# Altium PCB PCB-SHORT.PcbDoc
Units mm, origin at the board's own origin, x right, y up, seen from the top; angles counter-clockwise.
Board outline 22.9 x 21.8 mm, 2 copper layers (Top Layer, Bottom Layer), stack 1.57 mm thick; 29 components, 12 nets, 79 pads, 43 vias.
Unrouted connection lines stored in the file: 11.
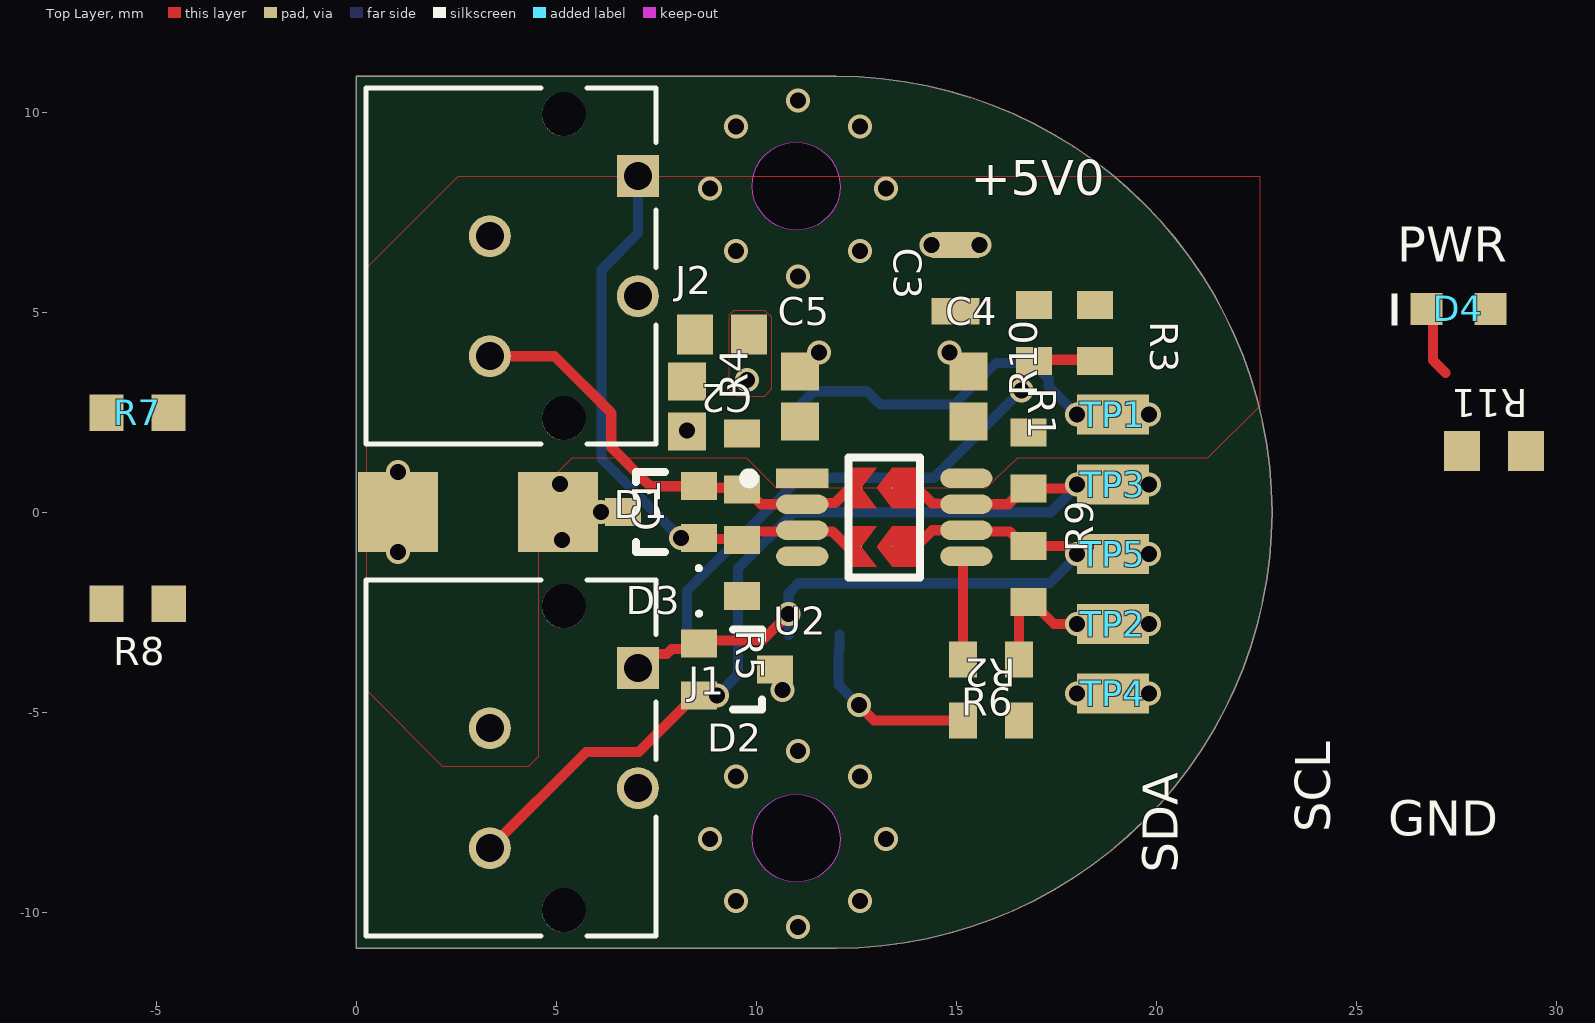
[diagram p0: Top Layer view]
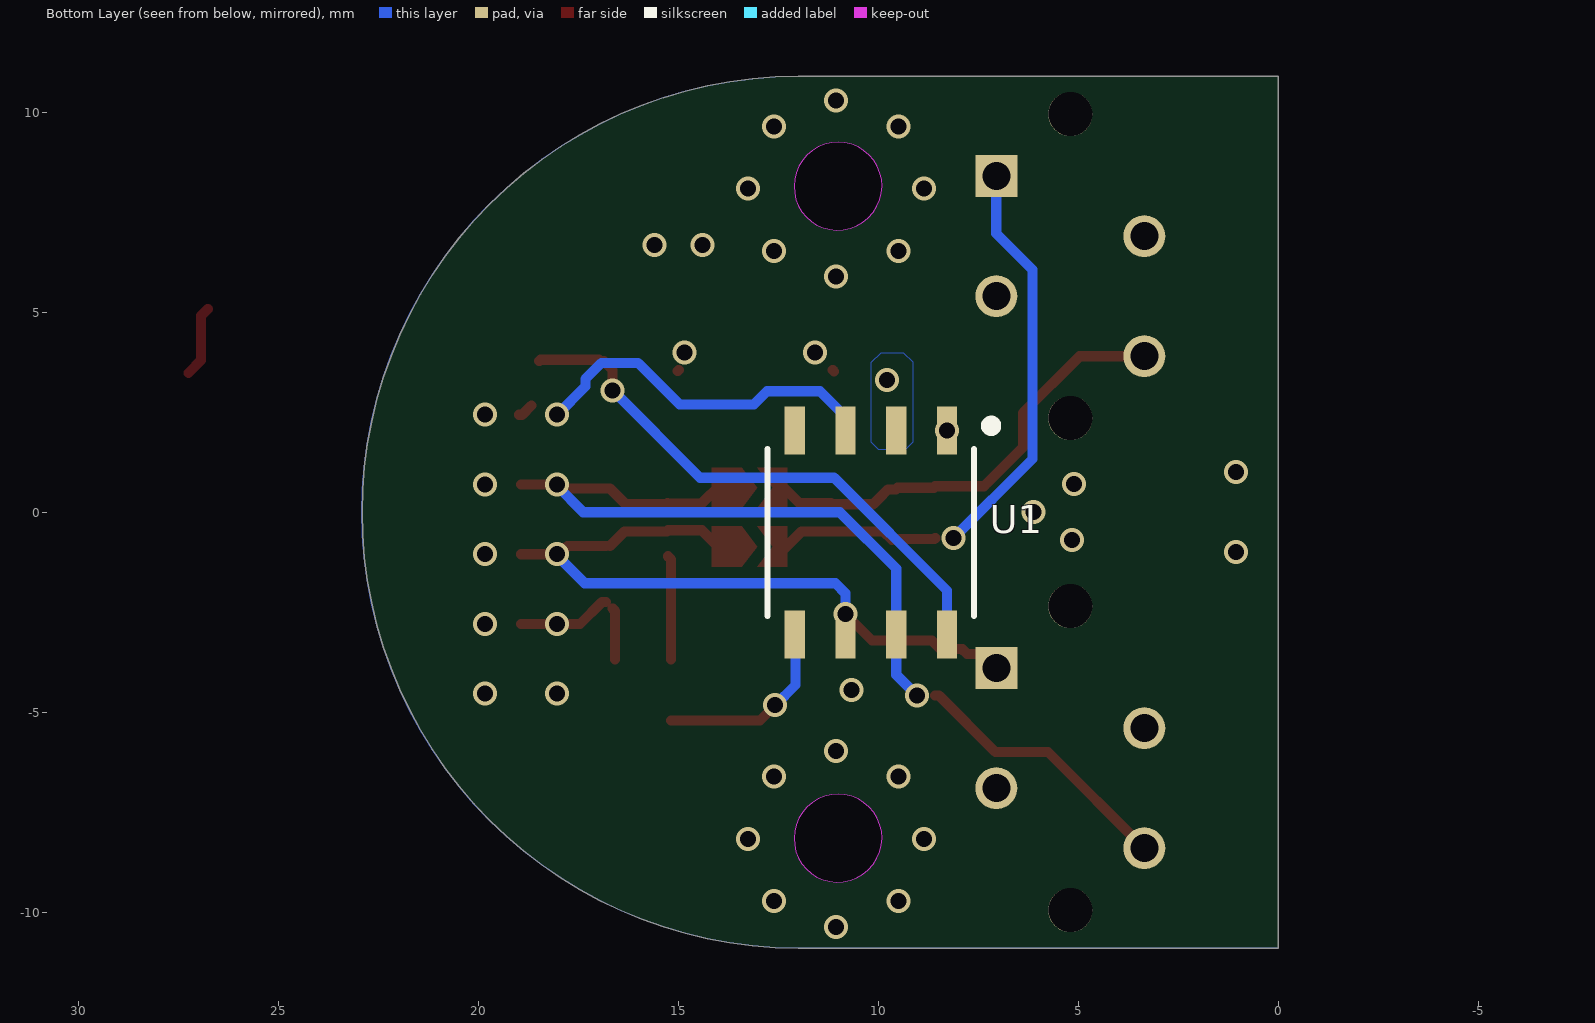
[diagram p1: Bottom Layer view, seen from below]

## Layer stack, top to bottom
Top Solder: solder mask 0.01, Solder Resist, Dk 3.5
Top Layer: signal copper 0.035
Dielectric 1: dielectric 1.5, FR-4, Dk 4.8
Bottom Layer: signal copper 0.035
Bottom Solder: solder mask 0.01, Solder Resist, Dk 3.5

## Board outline
0,-10.9 0,10.9 12,10.9 cw(c12,0) 12,-10.9
cut-out: 11.041,-9.249 cw(c11.02,-8.129) 9.9,-8.15 cw(c11,-8.15) 11,-7.05 cw(c11,-8.15) 12.1,-8.15 cw(c11.021,-8.17)
cut-out: 11.041,7.051 cw(c11.02,8.171) 9.9,8.15 cw(c11,8.15) 11,9.25 cw(c11,8.15) 12.1,8.15 cw(c11.021,8.13)

## Design rules (kind name [scope] priority, off if disabled: settings)
AssemblyTestPointUsage [All] p1: valid=2
Clearance [All] p1: gap=0.254 ignorepadtopadclearanceinfootprint=TRUE except(0: Arc-Hole Track-Hole SMDPad-Hole THPad-Hole Via-Hole Fill-Hole Poly-Hole Region-Hole Text-Hole)
FabricationTestPointUsage [All] p1: valid=2 allowmultiple=FALSE
HoleSize [All] p1: absolutevalues=TRUE maxlimit=6.3 minlimit=0.025 maxpercent=80.000 minpercent=20.000
MinimumSolderMaskSliver [All] p1: minsoldermaskwidth=0.1
NetAntennae [All] p1 off: netantennaetolerance=1
PolygonConnect Vias [IsVia] p1: connectstyle=Direct reliefconductorwidth=0.254 reliefentries=4 polygonreliefangle="90 Angle" airgapwidth=0.254
PolygonConnect DirectClass [InPadClass('Direct')] p2: connectstyle=Direct reliefconductorwidth=0.254 reliefentries=4 polygonreliefangle="90 Angle" airgapwidth=0.254
PolygonConnect [All] p3: connectstyle=Relief reliefconductorwidth=0.254 reliefentries=4 polygonreliefangle="90 Angle" airgapwidth=0.254
RoutingVias [All] p1: holewidth=0.4 width=0.6 viastyle="Through Hole" minholewidth=0.3 minwidth=0.5 maxholewidth=1 maxwidth=2
SolderMaskExpansion [All] p1: expansion=0.102 istentingtop=FALSE
UnRoutedNet [All] p1: checkbadconnections=TRUE
Width [All] p1: maxlimit=0.254 minlimit=0.254 preferedwidth=0.254
24 further rules are at their usual default settings.

## Classes and differential pairs
pad class Direct: C1-2 C2-2 C3-1 C3-2 C4-2 C5-2 D1-1 D1-2 D2-2 D4-2 J1-2 J1-3 J2-2 J2-3 R4-2 R10-2 TP2-1 TP4-1 U1-1 U1-2 U2-1 U2-8
component class "Bus Extender": C4 C5 R4 R5 R6 R7 R8 R9 R10 U2
component class Encoder: C1 C2 R1 R2 R3 TP1 U1
component class Connectors: C3 D1 D2 D3 D4 J1 J2 R11 TP2 TP3 TP4 TP5

## Components (designator, comment, footprint, x,y, rotation, side; value= is the part's Value field where it differs from the comment)
C1 "Capacitor 100 nF +/-10% 50 V 0603" CAPC1608X90X40NL10T20 8.277,2.644 r270 top value=100nF
C2 "Capacitor 1uF +/- 10% 16V 0603" CAPC1608X90X35NL15T15 9.144,4.445 r0 top value=1µF
C3 "CAP CER 10UF 16V X5R 0805" "CAP CER 10UF 16V X5R 0805-Footprint-1" 14.986,5.85 r270 top value=10µF
C4 "Capacitor 100 nF +/-10% 50 V 0603" CAPC1608X90X40NL10T20 15.316,2.896 r270 top value=100nF
C5 "Capacitor 100 nF +/-10% 50 V 0603" CAPC1608X90X40NL10T20 11.1,2.896 r270 top value=100nF
D1 "SZ1SMA5918BT3G" ONSC-SMA-2-403D-02_F_V 3.048,0 r0 top
D2 "DF3A6.8FUT1G" ONSC-SC-70-3-419-04_V 9.525,-3.937 r0 top
D3 "DF3A6.8FUT1G" ONSC-SC-70-3-419-04_V 7.62,0 r180 top
D4 "150060RS75000" WL-SMCW_0603_150060xx75000 27.559,5.08 r0 top
J1 "5031750400" 5031750400-Footprint-1 7.046,-3.9 r270 top locked
J2 "5031750400" 5031750400-Footprint-1 7.046,8.4 r270 top locked
R1 "Resistor 10k +/-1% 0603 100 mW" RESC1608X55X25NL10T15 16.949,4.476 r90 top value=10k
R2 "Resistor 10k +/-1% 0603 100 mW" RESC1608X55X25NL10T15 15.875,-5.207 r0 top value=10k
R3 "Resistor 10k +/-1% 0603 100 mW" RESC1608X55X25NL10T15 18.473,4.476 r270 top value=10k
R4 "Resistor 10k +/-1% 0603 100 mW" RESC1608X55X25NL10T15 9.652,1.27 r90 top value=10k
R5 "Resistor 10k +/-1% 0603 100 mW" RESC1608X55X25NL10T15 9.652,-1.397 r270 top value=10k
R6 "Resistor 10k +/-1% 0603 100 mW" RESC1608X55X25NL10T15 15.875,-3.683 r0 top value=10k
R7 "RC0603JR-070RL" RC0603JR-0720KL-Footprint-1 -5.463,2.489 r0 top value=0
R8 "RC0603JR-070RL" RC0603JR-0720KL-Footprint-1 -5.461,-2.286 r0 top value=0
R9 "Resistor 10k +/-1% 0603 100 mW" RESC1608X55X25NL10T15 16.806,-1.549 r270 top value=10k
R10 "Resistor 10k +/-1% 0603 100 mW" RESC1608X55X25NL10T15 16.806,1.295 r90 top value=10k
R11 "RC0603JR-07180RL" RESC0603(1608)_N 28.448,1.524 r180 top value=180
TP1 "RCUCTE" FP-S2761-46R-MFG 18.923,2.437 r0 top
TP2 "RCUCTE" FP-S2761-46R-MFG 18.923,-2.794 r180 top
TP3 "RCUCTE" FP-S2761-46R-MFG 18.923,0.693 r180 top
TP4 "RCUCTE" FP-S2761-46R-MFG 18.923,-4.539 r0 top
TP5 "RCUCTE" FP-S2761-46R-MFG 18.923,-1.05 r0 top
U1 "AS5600L-ASOM" AS5600L-ASOM-Footprint-1 10.354,-0.508 r270 bottom locked
U2 "PCA9517DP,118 (Inovation)" FP-SOT505-1-IPC_C 13.206,-0.127 r0 top

## Footprints (in the part's own frame and the unit in brackets; to place one, negate y for a bottom-side part, rotate by r counter-clockwise, add the part's x,y. Pads: shape width x height; smd on the part's side, far side on the other; paste and mask are expansions set on the pad)
5031750400-Footprint-1 [mm]
  rect 1.05x1.05 / inner round 1.524 / far side rect 1.05x1.05 hole 0.7 paste-2539.97 mask+0.076: 1(0,0)
  round 1.05 / inner round 1.524 / far side round 1.05 hole 0.7 paste-2539.97 mask+0.076: 2(1.5,-3.7) 3(3,0) 4(4.5,-3.7)
  round 1.1 / inner round 1.524 / far side round 1.1 hole 1.1 unplated paste-2539.97 mask+0.076: 5(-1.55,-1.85) 6(6.05,-1.85)
  silkscreen extent -2.2,-6.8 6.7,0.45, body extent -2.2,-6.8 6.7,0.45, height 6.96
AS5600L-ASOM-Footprint-1 [mil] "AS5600L-ASOM-Footprint"
  rect 47.11x20 smd paste+0 mask+0: 1(-100.55,81.77) 2(-100.55,31.77) 3(-100.55,-18.23) 4(-100.55,-68.23) 5(100.56,-68.23) 6(100.56,-18.23) 7(100.56,31.77) 8(100.56,81.77)
  silkscreen extent -110,-95 82,130, body extent -118,-90 118,103, height 69
"CAP CER 10UF 16V X5R 0805-Footprint-1" [mm]
  rect 0.652x1.199 smd paste+0 mask+0: 1(-0.826,0) 2(0.826,0)
  body extent -1,-0.63 1,0.63, height 1.35
CAPC1608X90X35NL15T15 [mm] "Chip Capacitor, 2-Leads, Body 1.75x0.95mm, IPC Medium Density"
  rect 0.9x1 smd: 1(-0.675,0) 2(0.675,0)
  body extent -0.87,-0.48 0.87,0.48, height 0.9
CAPC1608X90X40NL10T20 [mm] "Chip Capacitor, 2-Leads, Body 1.70x0.90mm, IPC Medium Density"
  rect 0.95x0.95 smd mask+0: 1(-0.625,0) 2(0.625,0)
  body extent -0.85,-0.45 0.85,0.45, height 0.9
FP-S2761-46R-MFG [mm]
  rect 1.8x1 smd paste+0 mask+0: 1(0,0)
  body extent -0.8,-0.4 0.8,0.4, height 1.28
FP-SOT505-1-IPC_C [mil]
  rect 51.39x18.98 smd paste+0 mask+0: 1(-80.73,38.39)
  rrect100% 51.39x18.98 smd paste+0 mask+0: 2(-80.73,12.8) 3(-80.73,-12.8) 4(-80.73,-38.39) 5(80.73,-38.39) 6(80.73,-12.8) 7(80.73,12.8) 8(80.73,38.39)
  round 1 smd mask+0: 2(-22.5,28.89) 3(-22.5,-28.89) 6(7.81,-28.89) 7(7.81,28.89)
  Top Layer region: 7.81,8.89 -7.19,28.89 7.81,48.89 37.34,48.89 37.34,8.89
  Top Layer region: -37.03,8.89 -37.03,48.89 -7.5,48.89 -22.5,28.89 -7.5,8.89
  Top Layer region: 7.81,-48.89 -7.19,-28.89 7.81,-8.89 37.34,-8.89 37.34,-48.89
  Top Layer region: -37.03,-48.89 -37.03,-8.89 -7.5,-8.89 -22.5,-28.89 -7.5,-48.89
  silkscreen extent -138,-59 35,59, body extent -96,-59 96,59, height 43
ONSC-SC-70-3-419-04_V [mm] "SOT23, 3-Leads, Body 2x1.25mm, Pitch 0.65mm"
  rect 0.9x0.7 smd: 1(-0.95,0.65) 2(-0.95,-0.65) 3(0.95,0)
  silkscreen extent -1,-1 0.63,1.45, body extent -0.63,-1 0.63,1, height 1
ONSC-SMA-2-403D-02_F_V [mm] "Molded, 2-Leads, Body 4.32x2.6mm"
  rect 2x2 smd: 1(-2,0) 2(2,0)
  body extent -2.16,-1.3 2.16,1.3, height 2.2
RC0603JR-0720KL-Footprint-1 [mm] "RC0603JR-0720KL-Footprint"
  rect 0.859x0.912 smd paste+0 mask+0: 1(-0.777,0) 2(0.777,0)
  body extent -0.8,-0.4 0.8,0.4, height 0.55
RESC0603(1608)_N [mm] "Chip Resistor, Body 1.6x0.8mm, IPC Medium Density"
  rect 0.9x1 smd: 1(-0.8,0) 2(0.8,0)
  body extent -0.85,-0.47 0.85,0.47, height 0.6
RESC1608X55X25NL10T15 [mm] "Chip Resistor, 2-Leads, Body 1.70x0.90mm, IPC Medium Density"
  rect 0.7x0.9 smd: 1(-0.7,0) 2(0.7,0)
  body extent -0.85,-0.45 0.85,0.45, height 0.55
WL-SMCW_0603_150060xx75000 [mm] "SMD Mono-color Chip LED, body 1.6x0.8mm"
  rect 0.8x0.8 smd: 1(-0.8,0) 2(0.8,0)
  silkscreen extent -1.67,-0.42 -1.52,0.38, body extent -0.8,-0.4 0.8,0.4, height 0.7

## Part data
C1 C4 C5: library part CMP-001-00017-8, "Chip Capacitor, 100 nF, +/- 10%, 50 V, 0603 (1608 Metric)", Capacitor Type=Ceramic, Case/Package=0603, Max Operating Temperature=125°C, Min Operating Temperature=-55°C, Tolerance=10%, Voltage Rating=50V, Mounting Technology=SM, Pins=2, RoHS Compliant=True
C2: library part CMP-001-00004-8, "Chip Capacitor, 1 uF, +/- 10%, 16 V, 0603 (1608 Metric)", Capacitor Type=Ceramic, Case/Package=0603, Max Operating Temperature=125°C, Min Operating Temperature=-55°C, Tolerance=10%, Voltage Rating=16V, Mounting Technology=SM, Pins=2, RoHS Compliant=True
C3: library part CMP-001-00084-6, "Ceramic Capacitor, Multilayer, Ceramic, 16V, 10% +Tol, 10% -Tol, X5R, 15% TC, 10uF, Surface Mount, 0805", Capacitor Type=Ceramic, Case/Package=0805, Max Operating Temperature=85°C, Min Operating Temperature=-55°C, Voltage Rating=16V, Mounting Technology="Surface Mount", Pins=2, RoHS Compliant=Yes
D1: library part CMP-004-00038-1, "Zener Diode, 5.1V V(Z), 5%, 1.5W, Silicon, Unidirectional", Max Operating Temperature=150°C, Max Power Dissipation=1.5W, Min Operating Temperature=-65°C, Package Body Material=Plastic, Package Shape=Rectangular, Package Style="SMALL OUTLINEMeter", Reference Voltage-Nom=5.1V, Test Current=73.5mA, Voltage Tol-Max=5%, Diode Element Material=SILICON, Diode Type=ZENER, Dynamic Impedance-Max=4R, JESD-30 Code=R-PDSO-C2, JESD-609 Code=e3, Moisture Sensitivity Level=1, Number of Elements=1, Pins=2, Polarity=Unidirectional, Reach SVHC Compliant=No, Reference Standard=AEC-Q101, RoHS Compliant=Yes, Surface Mount=Yes, Technology=ZENER, Terminal Finish=Tin, Terminal Form="C BEND", Terminal Position=DUAL
D2 D3: library part CMP-004-00039-1, "Trans Voltage Suppressor Diode, 150W, Unidirectional, 2 Element, Silicon", Max Breakdown Voltage=7.2V, Max Operating Temperature=150°C, Max Power Dissipation=200mW, Min Breakdown Voltage=6.4V, Min Operating Temperature=-55°C, Non-rep Peak Rev Power Dis-Max=150W, Package Body Material=Plastic, Package Shape=Rectangular, Package Style="SMALL OUTLINEMeter", Peak Reflow Temperature (Cel)=260°C, Reference Voltage-Nom=6.8V, Test Current=5mA, Time @ Peak Reflow Temperature-Max (s)=40s, Voltage Tol-Max=5.9%, Diode Element Material=SILICON, Diode Type="TRANS VOLTAGE SUPPRESSOR", Dynamic Impedance-Max=50R, JESD-30 Code=R-PDSO-G3, JESD-609 Code=e3, Moisture Sensitivity Level=1, Number of Elements=2, Pins=3, Polarity=Unidirectional, Qualification Status="Not Qualified", Reach SVHC Compliant=Yes, RoHS Compliant=Yes, Surface Mount=Yes, Technology=ZENER, Terminal Finish=Tin, Terminal Form="Gull Wing", Terminal Position=DUAL
D4: library part CMP-007-00036-1, "Single Color LED, Red, Water Clear, 1.1mm", Forward Current=30mA, Max Operating Temperature=85°C, Min Operating Temperature=-40°C, Mounting Technology="Surface Mount", Pins=2, RoHS Compliant=Yes
J1 J2: library part CMP-002-00074-2, "DIP Connector, 4 Contact(s), 2 Row(s), Female, Right Angle, 0.059 inch Pitch, Solder Terminal, Locking, Beige Insulator, Receptacle", Max Operating Temperature=85°C, Min Operating Temperature=-85°C, Connector Type=DIP, Mounting Technology=Board, RoHS Compliant=Yes
R1 R2 R3 R4 R5 R6 R9 R10: library part CMP-009-00017-7, "Chip Resistor, 10 KOhm, +/- 1%, 01 W, -55 to 155 degC, 0603 (1608 Metric)", Case/Package=0603, Max Operating Temperature=155°C, Min Operating Temperature=-55°C, Power=100mW, Tolerance=1%, Voltage Rating=50V, Mounting Technology=SM, Pins=2, RoHS Compliant=True
R7 R8: library part CMP-009-00199-1, "Metal Glaze/thick Film, 0.1W, 0ohm, Surface Mount, 0603", Case/Package=0603, Max Operating Temperature=155°C, Min Operating Temperature=-55°C, Package Height=0.45mm, Package Length=1.6mm, Package Shape=Rectangular, Package Style=SMTMeter, Package Width=0.8mm, Power=100mW, Rated Temperature=70°C, Resistor Type="FIXED RESISTOR", Temperature Coefficient=100ppm/°C, Tolerance=1%, Working Voltage=75V, Additional Feature="LASER TRIMMABLE", Construction=Chip, JESD-609 Code=e3, Mounting Technology="Surface Mount", Packaging="Tape and Reel", Pins=2, Reach SVHC Compliant=Yes, RoHS Compliant=Yes, Technology="METAL GLAZE/THICK FILM", Terminal Finish=Nickel, Termination=Wraparound
R11: library part CMP-009-00178-1, "Fixed Resistor, Metal Glaze/thick Film, 0.1W, 180ohm, 75V, 5% +/-Tol, 100ppm/Cel, Surface Mount, 0603", Case/Package=0603, Max Operating Temperature=155°C, Min Operating Temperature=-55°C, Power=100mW, Tolerance=5%, Mounting Technology="Surface Mount", Pins=2, RoHS Compliant=Yes
TP1 TP2 TP3 TP4 TP5: library part CMP-002-00072-5, "Test point", Case/Package=0603, Max Operating Temperature=125°C, Min Operating Temperature=-55°C, Connector Type="Interconnection Device", Mounting Technology="Surface Mount", Pins=2, RoHS Compliant=Yes
U1: library part CMP-010-00024-5, "AS5600L Series 12-Bit Programmable On-Axis Magnetic Rotary Position Sensor", Case/Package=SOIC-8, Max Operating Temperature=125°C, Max Supply Voltage=5V, Min Operating Temperature=-40°C, Min Supply Voltage=3.3V, Mounting Technology=SMD, Pins=8, Sensor Type="Magnetic Rotary Position Sensor"
U2: library part CMP-015-00013-1, "Interface Circuit, CMOS, PDSO8", Case/Package=TSSOP, Max Operating Temperature=85°C, Max Supply Voltage=5.5V, Min Operating Temperature=-40°C, Min Supply Voltage=2.7V, Nominal Supply Voltage=3.3V, Pins=8, RoHS Compliant=Yes

## Via types
v1: diameter 0.6, hole 0.4, Top Layer to Bottom Layer, tented both sides, 43 vias

## Nets (pads, with @x,y where several pads share a name; then routed paths per layer and width w, separated by ;. In a path a pad name is that pad's centre, name@x,y a point inside that pad or via, vN(x,y) a via of type N, cw(c..) or ccw(c..) an arc to the next point about the centre after c; other vN are vias at no path point)
+5V0: C1.2 C3.2 C4.2 C5.2 D1.1 D4.2 J1.2 J2.2 R1.2 R4.2 R5.2 R6.2 R9.2 R10.2 TP2.1 U1.1 U2.1 U2.8 | length 3.6
  Top Layer w0.254: R6.2 16.575,-2.472 R9.2@16.636,-2.412 ; R9.2 16.906,-2.249 17.451,-2.794 TP2.1
  other v1: 18.023,-2.794 19.823,-2.794 1.048,-1 1.048,1 8.277,2.046
GND: C1.1 C2.1 C3.1 C4.1 C5.1 D1.2 D2.3 D3.3 J1.3 J2.3 R2.2 R3.1 R11.1 TP4.1 U1.4 U2.4 | length 0.1
  Top Layer w0.254: C5.1 C5.1@11.135,3.556 ; C4.1@14.983,3.556 C4.1@15.008,3.531
  other v1: 18.023,-4.539 19.823,-4.539 10.668,-4.445 5.148,-0.7 6.12,0 5.101,0.7 11.575,3.996 14.841,3.996 14.386,6.676 15.586,6.676
NetC2_2: C2.2 U1.2
  other v1: 9.779,3.302
NetD2_1: D2.1 J1.1 R8.2 R9.1 TP5.1 U1.6 U2.6 | length 18.4
  Top Layer w0.254: J1.1 7.401,-3.545 7.771,-3.545 7.893,-3.423 8.439,-3.423 D2.1 8.656,-3.206 10.155,-3.206 10.704,-2.656 10.785,-2.656 10.817,-2.688 v1(10.817,-2.543) ; 13.908,-0.951 14.407,-0.452 15.256,-0.452 15.284,-0.48 16.337,-0.48 R9.1@16.706,-0.849 ; R9.1 17.769,-0.849 v1@17.97,-1.05 ; v1(18.023,-1.05) TP5.1
  Bottom Layer w0.254: U1.6 v1(10.817,-2.543) 10.817,-2.024 11.064,-1.778 17.336,-1.778 18.023,-1.091 v1(18.023,-1.05)
  other v1: 19.823,-1.05
NetD2_2: D2.2 J1.4 R7.2 R10.1 TP3.1 U1.7 U2.7 | length 25
  Top Layer w0.254: J1.4 5.752,-5.994 7.068,-5.994 8.475,-4.587 D2.2 ; 13.934,0.692 14.407,0.219 U2.7@15.256,0.219 ; U2.7@15.256,0.198 U2.7@15.256,0.219 ; v1(18.023,0.693) TP3.1 ; TP3.1@18.064,0.693 17.997,0.627 17.828,0.627 17.797,0.595 R10.1 16.706,0.595 16.309,0.198 15.291,0.198 15.263,0.226 U2.7@15.256,0.219
  Bottom Layer w0.254: v1(9.025,-4.587) 9.547,-4.065 U1.7 9.547,-1.408 10.955,0 17.37,0 18.023,0.653 v1(18.023,0.693)
  other v1: 19.823,0.693
NetD3_1: D3.1 J2.1 R5.1 R8.1 U2.3 | length 14.5
  Top Layer w0.254: D3.1 8.593,-0.673 9.628,-0.673 R5.1 9.869,-0.48 11.91,-0.48 12.508,-1.078
  Bottom Layer w0.254: J2.1 7.046,6.966 6.14,6.06 6.14,1.33 v1(8.12,-0.65)
NetD3_2: D3.2 J2.4 R4.1 R7.1 U2.2 | length 11.4
  Top Layer w0.254: J2.4 4.963,3.9 6.38,2.483 6.38,1.621 7.27,0.731 7.278,0.731 7.359,0.65 D3.2 8.61,0.61 9.512,0.61 9.552,0.57 R4.1 9.752,0.57 9.975,0.347 10.124,0.198 11.156,0.198 11.183,0.226 11.966,0.226 12.506,0.766
NetD4_1: D4.1 R11.2 | length 1.8
  Top Layer w0.254: D4.1 26.926,4.913 26.926,3.796 27.241,3.481
NetR1_1: R1.1 R3.2 U1.8 | length 14
  Top Layer w0.254: v1(16.637,3.048) 16.637,3.553 16.86,3.776 R1.1 16.983,3.81 18.439,3.81 R3.2
  Bottom Layer w0.254: U1.8 8.277,-1.959 11.098,0.862 14.451,0.862 v1(16.637,3.048)
NetR2_1: R2.1 U1.5 | length 4.7
  Top Layer w0.254: v1(12.573,-4.826) 12.954,-5.207 R2.1
  Bottom Layer w0.254: U1.5 12.087,-3.45 12.066,-3.472 12.066,-4.319 v1(12.573,-4.826)
NetR6_1: R6.1 U2.5 | length 2.6
  Top Layer w0.254: R6.1 15.175,-1.183 U2.5
OUT: TP1.1 U1.3 | length 9.4
  Top Layer w0.254: TP1.1@18.669,2.667 18.899,2.437 TP1.1@18.971,2.437
  Bottom Layer w0.254: U1.3 10.817,2.39 11.452,3.025 12.776,3.025 13.11,2.691 14.962,2.691 16,3.729 16.919,3.729 17.318,3.33 17.318,3.142 v1(18.023,2.437)
  other v1: 19.823,2.437
pads on no net: J1.5 J1.6 J2.5 J2.6
copper on no net:
  other v1: 11.049,-10.369 9.493,-9.725 12.605,-9.725 8.849,-8.169 13.249,-8.169 9.493,-6.613 12.605,-6.613 11.049,-5.969 11.049,5.887 9.493,6.531 12.605,6.531 8.849,8.087 13.249,8.087 9.493,9.643 12.605,9.643 11.049,10.287

## Polygon pours and split planes (outlines as drawn)
+5V0 on Top Layer "NONET_L01_P002" (solid, remove dead copper, shelved, pour order 2): 9.754,1.356 10.503,0.607 15.758,0.607 16.544,1.356 21.295,1.356 22.606,2.667 22.606,8.382 2.54,8.382 0.254,6.096 0.254,-4.445 2.159,-6.35 4.318,-6.35 4.572,-6.096 4.572,-0.254 4.572,0.524 5.404,1.356
GND on Top Layer "NONET_L01_P004" (solid, remove dead copper, shelved, pour order 4): 12,10.9 0,10.9 0,-10.9 12,-10.9 ccw(c12.005,0)
NetC2_2 on Top Layer "NONET_L01_P001" (solid, shelved, pour order 1): 9.327,3.075 9.327,4.932 9.45,5.054 10.212,5.054 10.384,4.882 10.384,3.071 10.203,2.889 9.512,2.889
GND on Bottom Layer "NONET_L02_P005" (solid, remove dead copper, shelved, pour order 5): 12,10.9 0,10.9 0,-10.9 12,-10.9 ccw(c12.005,0)
NetC2_2 on Bottom Layer "NONET_L02_P000" (solid, shelved, pour order 0): 9.125,1.761 9.125,3.748 9.355,3.978 9.939,3.978 10.182,3.735 10.182,1.757 10.001,1.576 9.311,1.576

## Other copper
Top Layer:
  pour cut-out: 11,5.15 cw(c11,8.15) 8,8.15 cw(c11,8.15) 11,11.15 cw(c11,8.15) 14,8.15 cw(c11,8.15)
  pour cut-out: 11,-11.15 cw(c11,-8.15) 8,-8.15 cw(c11,-8.15) 11,-5.15 cw(c11,-8.15) 14,-8.15 cw(c11,-8.15)
Bottom Layer:
  pour cut-out: 11,-11.15 cw(c11,-8.15) 8,-8.15 cw(c11,-8.15) 11,-5.15 cw(c11,-8.15) 14,-8.15 cw(c11,-8.15)
  pour cut-out: 11,5.15 cw(c11,8.15) 8,8.15 cw(c11,8.15) 11,11.15 cw(c11,8.15) 14,8.15 cw(c11,8.15)

## Silkscreen, mask and mechanical layers (free items; w line width, h text height)
Top Overlay:
  text "+5V0" at 15.367,7.636 h1.5
  text "PWR" at 26.035,5.969 h1.5
  text "OUT" at 32.496,0.381 h1.5 r90
  text "SCL" at 24.638,-8.001 h1.5 r90
  text "GND" at 25.802,-8.374 h1.5
  text "SDA" at 20.829,-9.017 h1.5 r90
Mechanical 1:
  circle w0.1: c11,-8.15 r1.1
  circle w0.1: c11,-8.15 r3
  circle w0.1: c11,8.15 r3
  circle w0.1: c11,8.15 r1.1
  lines w0.1: 9.854,-0.508 10.854,-0.508 ; 10.354,-1.008 10.354,-0.008
  lines w0.2: 12,-10.9 0,-10.9 0,10.9 12,10.9 cw(c12,0) 12,-10.9
  text "INPUT" at 0,11.811 h1.52
  text "OUTPUT" at 0,-13.208 h1.52